# Altium PCB SimpleNYT_prorto.PcbDoc
Units mm, origin at the board's own origin, x right, y up, seen from the top; angles counter-clockwise.
Board outline 37.62 x 40 mm, 2 copper layers (Top Layer, Bottom Layer); 40 components, 42 nets, 145 pads, 3 vias.
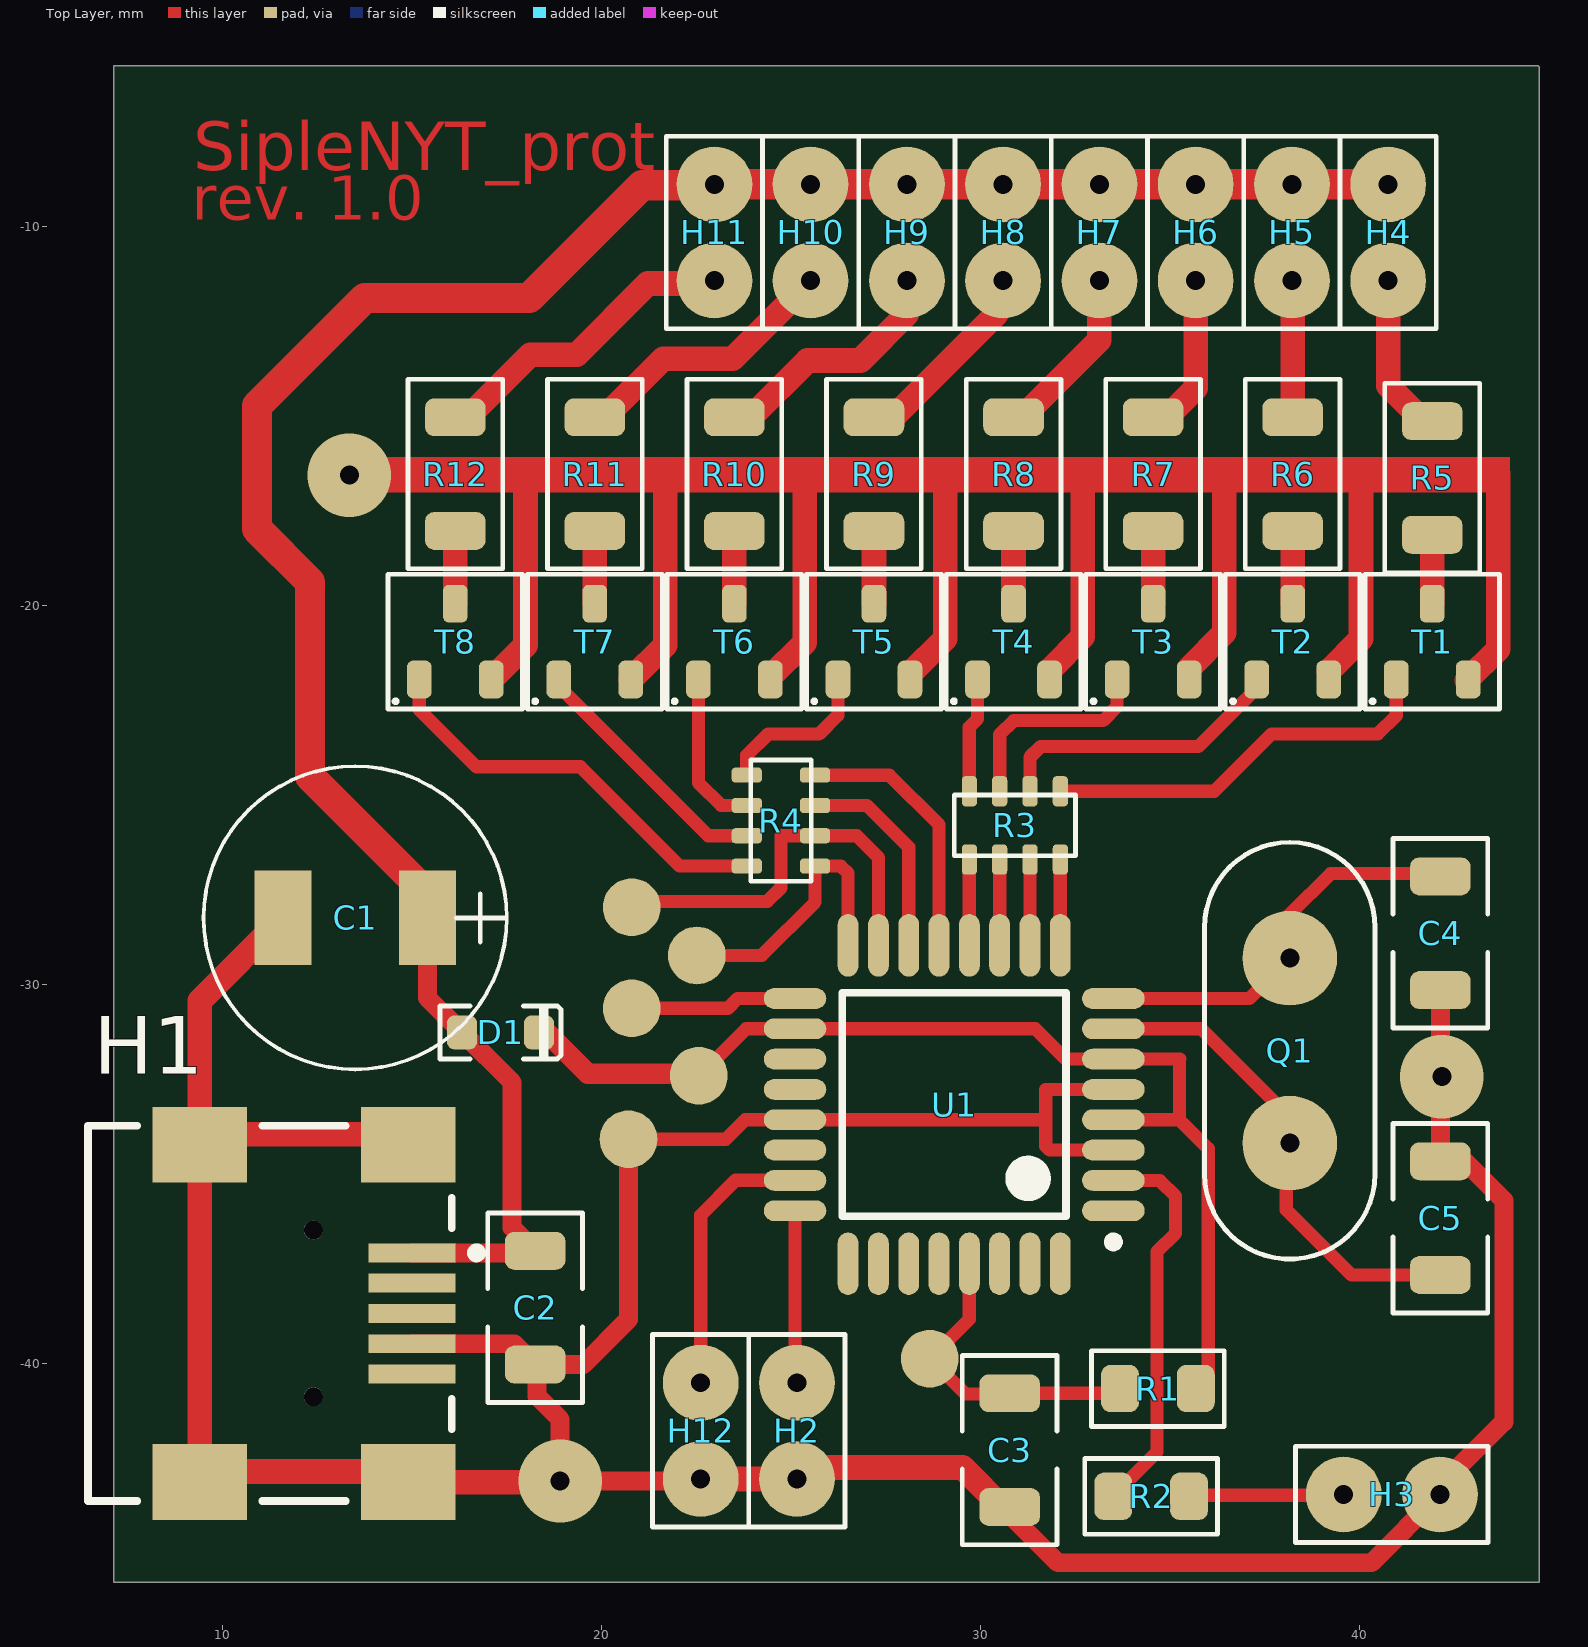
[diagram p0: Top Layer view]
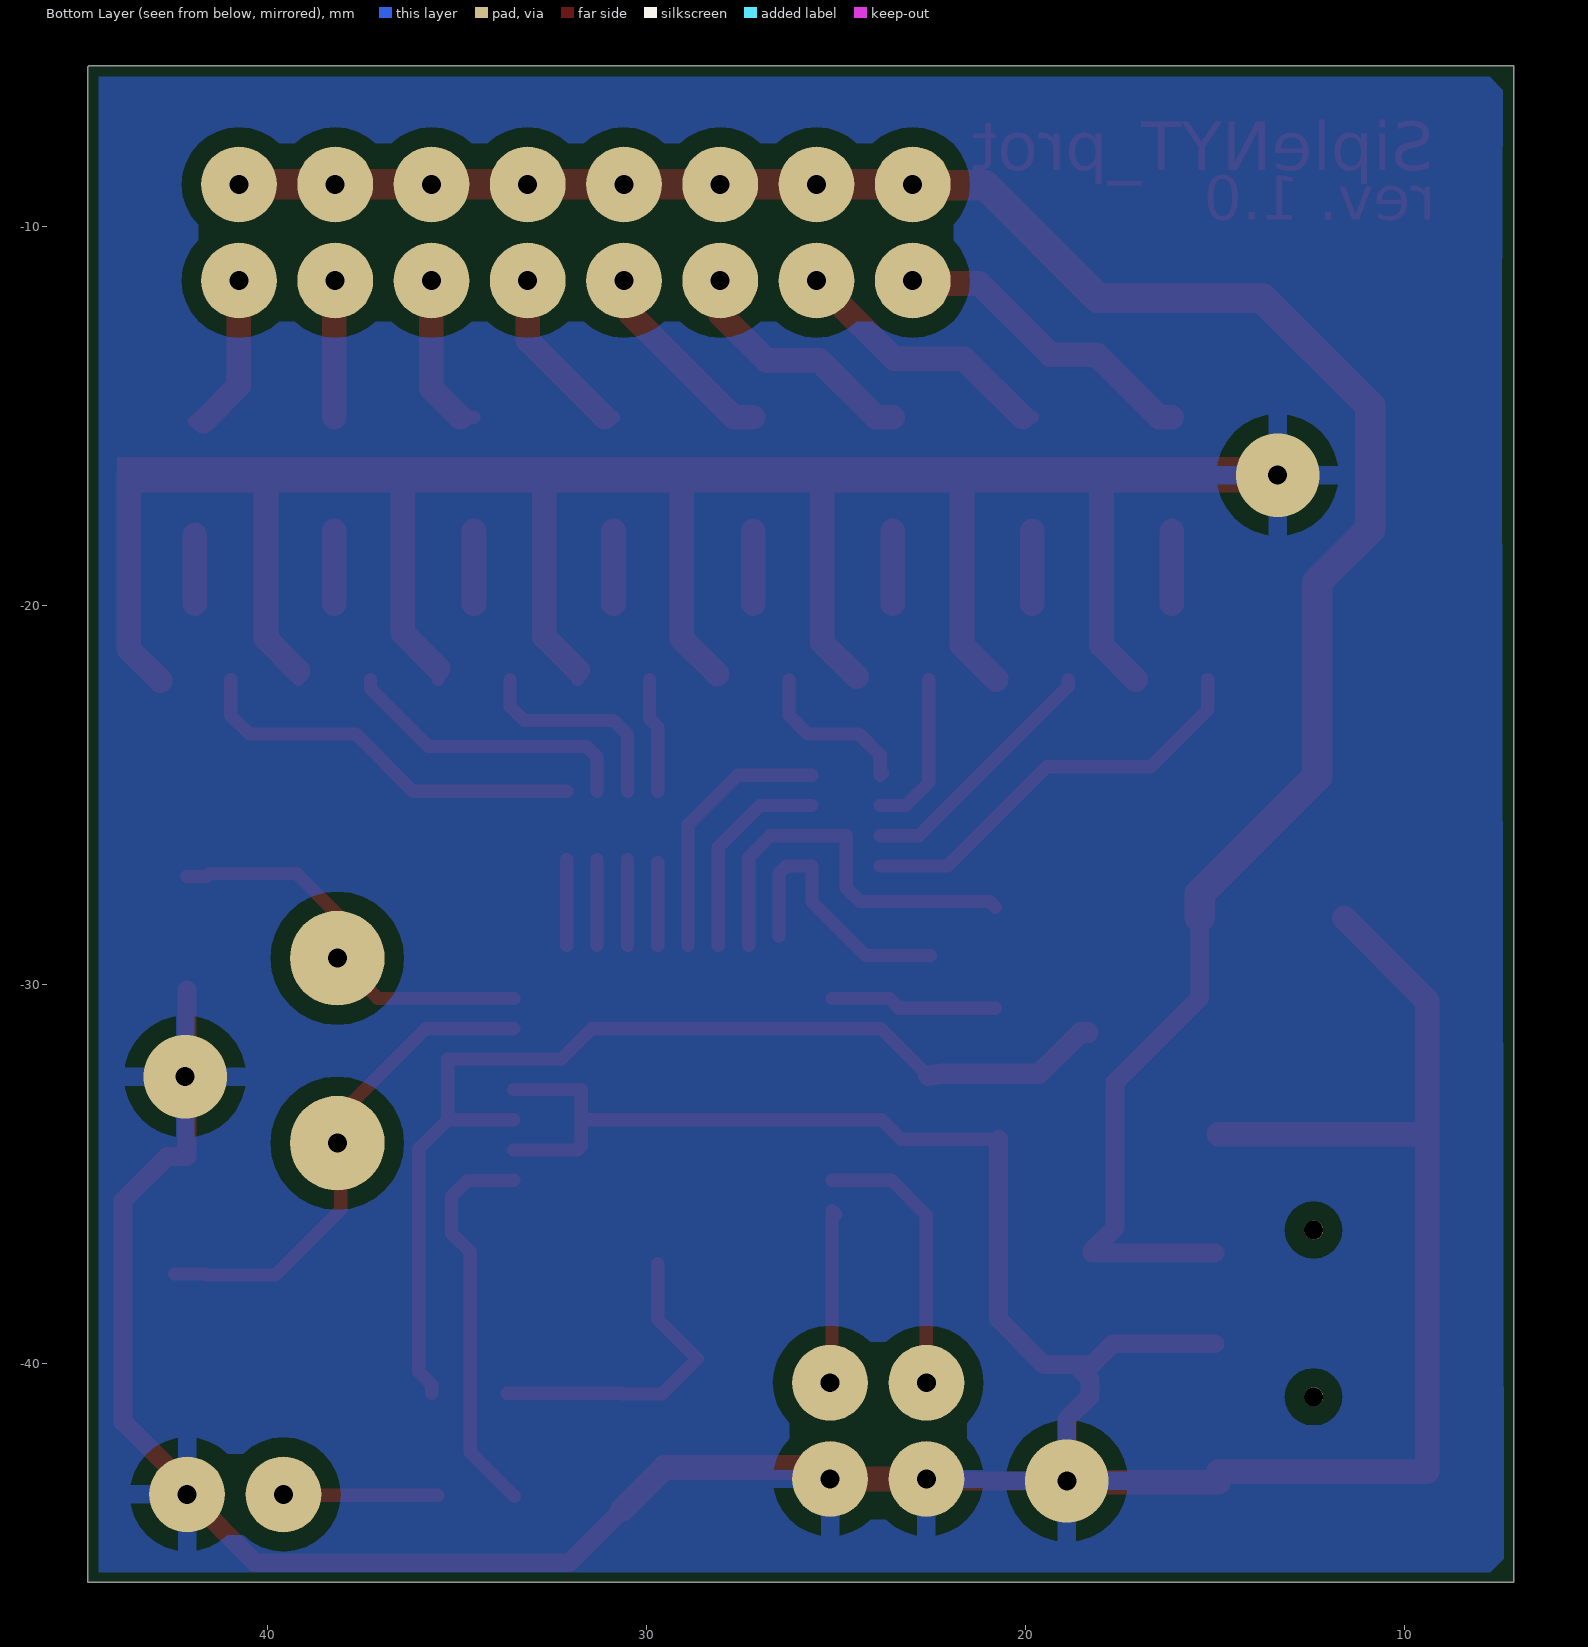
[diagram p1: Bottom Layer view, seen from below]
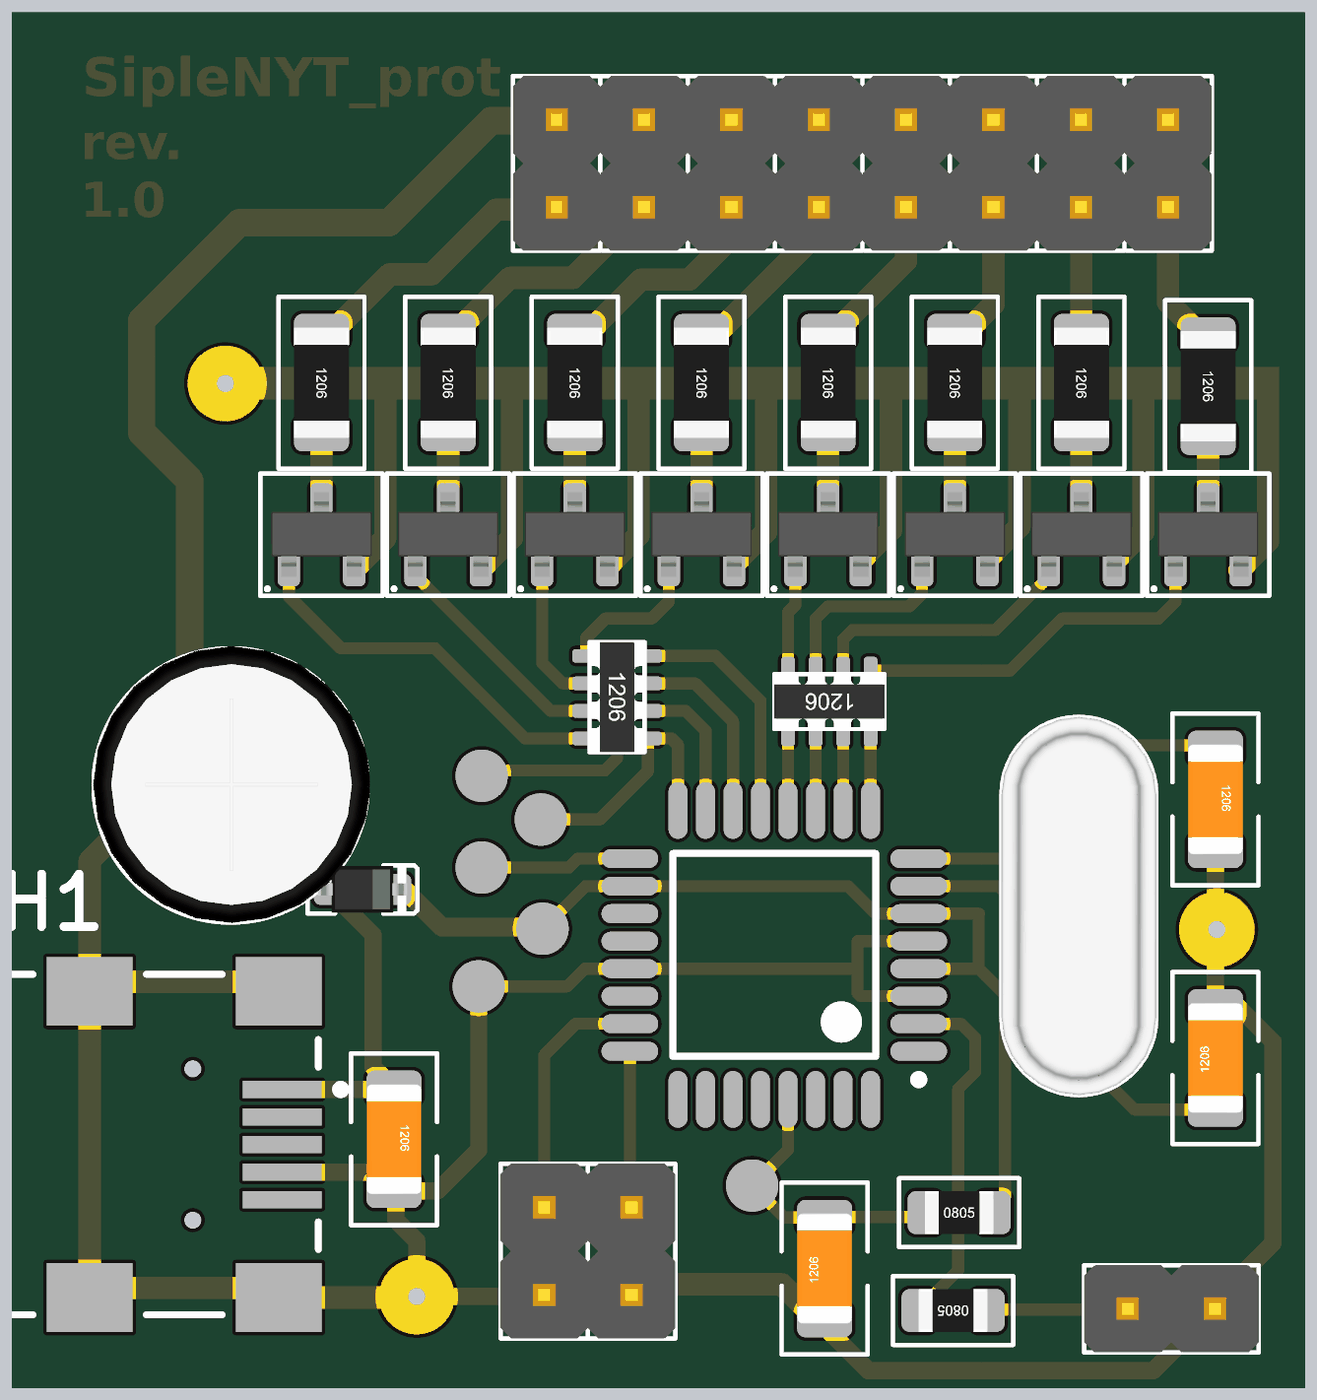
[diagram p2: 3D render of the assembled board from above, using the file's embedded part models]

## Layer stack, top to bottom
Top Solder: solder mask 0.0102, Solder Resist, Dk 3.5
Top Layer: signal copper 0.0356
Dielectric 1: dielectric 0.32, FR-4, Dk 4.8
Bottom Layer: signal copper 0.0356
Bottom Solder: solder mask 0.0102, Solder Resist, Dk 3.5

## Board outline
7.112,-45.771 7.112,-5.766 44.704,-5.766 44.729,-5.791 44.729,-45.771

## Design rules (kind name [scope] priority, off if disabled: settings)
Clearance Clearance_Polygon [InNet('GND') And InPolygon] p1: gap=0.5
Clearance [All] p2: gap=0.25
PlaneConnect [All] p1: planeconnectstyle=Relief reliefexpansion=0.508 reliefentries=4 reliefconductorwidth=0.35 reliefairgap=0.5
PolygonConnect [All] p1: connectstyle=Relief reliefconductorwidth=0.5 reliefentries=4 polygonreliefangle="90 Angle" airgapwidth=0.5
RoomDefinition SimpleNYT_prorto [InComponentClass('SimpleNYT_prorto')] p1: confinementstyle=ConfineIn formatcopy=TRUE lockcomponents=FALSE outline -45,-117.5 5.8,-117.5 5.8,-92.1 -45,-92.1
RoutingVias [All] p1: holewidth=0.711 width=1.27 viastyle="Through Hole" minholewidth=0.711 minwidth=1.27 maxholewidth=0.711 maxwidth=1.27
SolderMaskExpansion [All] p1: expansion=0.102
Width [All] p1: maxlimit=5.254 minlimit=0.254 preferedwidth=0.254
29 further rules are at their usual default settings.

## Components (designator, comment, footprint, x,y, rotation, side; value= is the part's Value field where it differs from the comment)
C1 "470u" El-d8-h12-F3.81 13.487,-28.245 r0 top
C2 "1u" C1206(3216) 18.237,-38.532 r270 top
C3 "100n" C1206(3216) 30.759,-42.291 r90 top
C4 "1u" C1206(3216) 42.122,-28.651 r270 top
C5 "1u" C1206(3216) 42.122,-36.169 r90 top
D1 "1N4148" SOD323 17.323,-31.267 r0 top
H1 "440247-2" 440247 7.137,-38.684 r180 top
H2 "H-1x2" J1x2 25.146,-41.783 r90 top
H3 "H-1x2" J1x2 40.843,-43.459 r0 top
H4 "H-1x2" J1x2 40.747,-10.16 r90 top
H5 "H-1x2" J1x2 38.207,-10.16 r90 top
H6 "H-1x2" J1x2 35.667,-10.16 r90 top
H7 "H-1x2" J1x2 33.127,-10.16 r90 top
H8 "H-1x2" J1x2 30.587,-10.16 r90 top
H9 "H-1x2" J1x2 28.047,-10.16 r90 top
H10 "H-1x2" J1x2 25.507,-10.16 r90 top
H11 "H-1x2" J1x2 22.967,-10.16 r90 top
H12 "H-1x2" J1x2 22.606,-41.783 r90 top
Q1 "16MHz" HC49S 38.151,-31.75 r90 top
R1 "10k" R0805 34.671,-40.665 r0 top
R2 "1k" R0805 34.493,-43.51 r180 top
R3 "4,7k" RM4x0603 30.895,-25.806 r270 top
R4 "4,7k" RM4x0603 24.723,-25.679 r0 top
R5 "47" R1206 41.91,-16.637 r270 top
R6 "47" R1206 38.227,-16.535 r270 top
R7 "47" R1206 34.544,-16.535 r270 top
R8 "47" R1206 30.861,-16.535 r270 top
R9 "47" R1206 27.178,-16.535 r270 top
R10 "47" R1206 23.495,-16.535 r270 top
R11 "47" R1206 19.812,-16.535 r270 top
R12 "47" R1206 16.129,-16.535 r270 top
T1 "BC847C" SOT23 41.91,-20.955 r0 top
T2 "BC847C" SOT23 38.227,-20.955 r0 top
T3 "BC847C" SOT23 34.544,-20.955 r0 top
T4 "BC847C" SOT23 30.861,-20.955 r0 top
T5 "BC847C" SOT23 27.178,-20.955 r0 top
T6 "BC847C" SOT23 23.495,-20.955 r0 top
T7 "BC847C" SOT23 19.812,-20.955 r0 top
T8 "BC847C" SOT23 16.129,-20.955 r0 top
U1 "ATmega88A-AU" 32A_N 29.295,-33.172 r180 top

## Footprints (in the part's own frame and the unit in brackets; to place one, negate y for a bottom-side part, rotate by r counter-clockwise, add the part's x,y. Pads: shape width x height; smd on the part's side, far side on the other; paste and mask are expansions set on the pad)
32A_N [mm] "Thin QFP, 32-Leads, Body 7x7mm, Pitch 0.8mm, IPC Medium Density"
  oval 1.65x0.55 smd: 1(-4.2,2.8) 2(-4.2,2) 3(-4.2,1.2) 4(-4.2,0.4) 5(-4.2,-0.4) 6(-4.2,-1.2) 7(-4.2,-2) 8(-4.2,-2.8) 17(4.2,-2.8) 18(4.2,-2) 19(4.2,-1.2) 20(4.2,-0.4) 21(4.2,0.4) 22(4.2,1.2) 23(4.2,2) 24(4.2,2.8)
  oval 0.55x1.65 smd: 9(-2.8,-4.2) 10(-2,-4.2) 11(-1.2,-4.2) 12(-0.4,-4.2) 13(0.4,-4.2) 14(1.2,-4.2) 15(2,-4.2) 16(2.8,-4.2) 25(2.8,4.2) 26(2,4.2) 27(1.2,4.2) 28(0.4,4.2) 29(-0.4,4.2) 30(-1.2,4.2) 31(-2,4.2) 32(-2.8,4.2)
  silkscreen extent -4.33,-2.95 2.95,3.75, body extent -3.5,-3.5 3.5,3.5, height 1.2
440247 [mm] "Connector; USB2.0, Type B, SM; 5 Position; Right Angle"
  rect 2.3x0.5 smd: 1(-7.85,-1.6) 2(-7.85,-0.8) 3(-7.85,0) 4(-7.85,0.8) 5(-7.85,1.6)
  rect 2.5x2 smd: 6(-7.75,4.45) 7(-2.25,4.45) 8(-7.75,-4.45) 9(-2.25,-4.45)
  round 0.5 hole 0.5 unplated: MH1(-5.25,2.2) MH2(-5.25,-2.2)
  silkscreen extent -9.68,-4.95 0.7,4.95
C1206(3216) [mm]
  rrect50% 1x1.6 smd: 1(-1.5,0) 2(1.5,0)
  silkscreen extent -2.5,-1.25 2.5,1.25, body extent -1.6,-0.8 1.6,0.8, height 1
El-d8-h12-F3.81 [mm]
  rect 1.5x2.5 smd: 1(1.905,0) 2(-1.905,0)
  silkscreen extent -4,-4 4,4, body extent -4,-4 4.05,4.05, height 12.53
HC49S [mm]
  round 2.5 hole 0.5: 1(-2.44,0) 2(2.44,0)
  silkscreen extent -5.5,-2.25 5.5,2.25, body extent -5.5,-2.25 5.5,2.25, height 3.7
J1x2 [mm]
  round 2 hole 0.5: 1(-1.27,0) 2(1.27,0)
  silkscreen extent -2.54,-1.27 2.54,1.27, body extent -2.54,-1.27 2.54,1.27, height 10.1
R0805 [mm]
  rrect50% 1x1.25 smd: 1(-1,0) 2(1,0)
  silkscreen extent -1.75,-1 1.75,1, body extent -1,-0.62 1,0.63, height 0.6
R1206 [mm]
  rrect50% 1x1.6 smd: 1(-1.5,0) 2(1.5,0)
  silkscreen extent -2.5,-1.25 2.5,1.25, body extent -1.6,-0.8 1.6,0.8, height 0.6
RM4x0603 [mm]
  rrect50% 0.8x0.4 smd: 1(-0.9,1.2) 2(-0.9,0.4) 3(-0.9,-0.4) 4(-0.9,-1.2) 5(0.9,-1.2) 6(0.9,-0.4) 7(0.9,0.4) 8(0.9,1.2)
  silkscreen extent -0.8,-1.6 0.8,1.6, body extent -0.8,-1.6 0.8,1.6, height 0.5
SOD323 [mm]
  rrect50% 0.8x0.9 smd: 1(-1.016,0) 2(1.016,0)
  silkscreen extent -1.6,-0.76 1.6,0.7, body extent -1.3,-0.67 1.3,0.67, height 1.1
SOT23 [mm] "SOT-23; 3 Leads; Body 3.0 x 2.6 mm Pitch 0.95mm"
  rrect50% 0.65x1 smd: 1(-0.95,-1) 2(0.95,-1) 3(0,1)
  silkscreen extent -1.78,-1.78 1.78,1.78, body extent -1.46,-1.23 1.46,1.24, height 1

## Part data
C1: library part 470u-16V, "16V"
C2 C3 C4 C5: library part C-1206, "SMD-1206"
D1: "DO-35 75V 0.2A 1uS 4A 4nS"
H1: "USB 2.0, Right Angle, SMT, B Type, Receptacle, 5 Position, Black"
Q1: library part Q
R1 R2: library part R-0805, "SMD 0805 0.1W 5% 150V"
R3 R4: library part 4RM-0603, "SMD 4RM-0603 1\16W 5%"
R5 R6 R7 R8 R9 R10 R11 R12: library part R-1206, "SMD 1206 0.125W 5% 200V"
T1 T2 T3 T4 T5 T6 T7 T8: "SMD-SOT23"
U1: "8-bit AVR Microcontroller, 8KB Flash, 512 Bytes EEPROM, 1KB SRAM, 32-pin TQFP, Industrial Grade (-40°C to 85°C)"

## Free pads (board coordinates)
  round 1.524 smd: 2(20.701,-34.087) 2(20.786,-30.632) 2(20.786,-27.965) 2(22.504,-29.235) 2(22.555,-32.41) 2(28.651,-39.878)

## Via types
v1: diameter 2.2, hole 0.5, Top Layer to Bottom Layer, 2 vias
v2: diameter 2.2/2.2 (per signal layer), hole 0.5, Top Layer to Bottom Layer, 1 vias

## Nets (pads, with @x,y where several pads share a name; then routed paths per layer and width w, separated by ;. In a path a pad name is that pad's centre, name@x,y a point inside that pad or via, vN(x,y) a via of type N, cw(c..) or ccw(c..) an arc to the next point about the centre after c; other vN are vias at no path point)
CH1: R3.8 U1.9 | length 2.3
  Top Layer w0.35: U1.9 R3.8
CH2: R3.7 U1.10 | length 2.3
  Top Layer w0.35: U1.10 R3.7
CH3: R3.6 U1.11 | length 2.3
  Top Layer w0.35: U1.11 R3.6@30.495,-26.706
CH4: R3.5 U1.12 | length 2.2
  Top Layer w0.35: U1.12 R3.5@29.695,-26.782
CH5: R4.8 U1.13 | length 7
  Top Layer w0.35: R4.8 27.587,-24.479 28.895,-25.787 U1.13
CH6: R4.7 U1.14 | length 5.5
  Top Layer w0.35: R4.7 26.99,-25.279 28.095,-26.384 U1.14
FDBCK: R2.2 U1.2 | length 10.4
  Top Layer w0.35: R2.2@33.477,-43.51 34.646,-42.342 34.646,-37.059 35.137,-36.567 35.137,-35.594 34.721,-35.179 33.502,-35.179 U1.2
GND: C1.2 C2.2 C3.1 C4.2 C5.2 H1.4 H1.6 H1.7 H1.8 H1.9 H2.1 H3.2 H12.1 pad.2@20.701,-34.087 T1.2 T2.2 T3.2 T4.2 T5.2 T6.2 T7.2 T8.2 U1.3 U1.5 U1.21 | length 148.3
  Top Layer w0.35: pad.2@20.701,-34.087 23.266,-34.087 23.781,-33.572 U1.21 31.695,-33.572 31.714,-33.553 ; T6.2 T6.2@24.445,-21.885 ; 25.349,-16.485 25.375,-16.459 ; T5.2 T5.2@28.128,-21.808 ; T4.2 T4.2@31.811,-21.707 ; U1.3 31.816,-34.372 31.714,-34.271 31.714,-33.553 ; U1.5 31.714,-32.772 31.714,-33.553 ; T3.2 T3.2@35.494,-21.656 ; T2.2 T2.2@39.177,-21.732 ; T1.2@42.821,-21.98 T1.2@42.821,-21.808
  Top Layer w0.5: H1.4 17.69,-39.484 C2.2 C2.2@18.669,-40.032 ; pad.2@20.701,-34.087 20.701,-38.837 19.506,-40.032 C2.2@18.669,-40.032 ; H12.1 22.555,-43.104 v1(18.898,-43.104) 18.898,-41.478 18.288,-40.869 18.288,-40.413 C2.2@18.669,-40.032 ; C3.1@30.632,-43.866 32.029,-45.263 40.31,-45.263 H3.2 42.113,-43.231 43.8,-41.544 43.8,-35.7 42.644,-34.544 42.122,-34.544 C4.2
  Top Layer w0.65: C1.2 9.387,-30.44 H1.9@9.387,-33.955 ; H1.6 18.867,-43.134 v1(18.898,-43.104) ; H1.6@14.887,-42.855 9.387,-42.855 H1.9@9.387,-33.955 ; H1.8@14.887,-33.955 H1.9@9.387,-33.955 ; T8.2 17.983,-21.051 17.983,-16.535 ; T7.2 21.666,-21.051 21.666,-16.51 ; H12.1 H2.1 25.451,-42.748 29.515,-42.748 C3.1@30.632,-43.866 ; T6.2@24.445,-21.885 25.349,-20.98 25.349,-16.485 ; T5.2@28.128,-21.808 29.058,-20.879 29.058,-16.561 ; T4.2@31.811,-21.707 32.69,-20.828 32.69,-16.51 ; T3.2@35.494,-21.656 36.424,-20.726 36.424,-16.561 ; T2.2@39.177,-21.732 40.03,-20.879 40.03,-16.535 ; T1.2@42.821,-21.98 43.649,-21.152 43.649,-16.51
  other v1: 13.335,-16.561
  other v2: 42.164,-32.436
INT0: H12.2 U1.23 | length 7.3
  Top Layer w0.35: H12.2 22.606,-36.09 23.524,-35.172 U1.23
INT1: H2.2 U1.24 | length 4.7
  Top Layer w0.35: U1.24@24.996,-36.071 U1.24 25.095,-40.462 H2.2
MCVCC: D1.2 pad.2@22.555,-32.41 R1.2 U1.4 U1.6 U1.18 | length 29.2
  Top Layer w0.35: pad.2@22.555,-32.41 22.945,-32.029 23.802,-31.172 U1.18 31.435,-31.172 32.235,-31.972 U1.6 35.245,-31.972 35.239,-31.978 35.239,-33.572 ; U1.4 35.239,-33.572 ; R1.2@35.662,-40.792 35.662,-40.564 36.001,-40.225 36.001,-34.334 35.239,-33.572
  Top Layer w0.55: D1.2 18.542,-31.267 19.634,-32.36 22.22,-32.36 pad.2@22.555,-32.41
MISO/CH8: pad.2@22.504,-29.235 R4.5 U1.16 | length 7.3
  Top Layer w0.35: pad.2@22.504,-29.235 24.215,-29.235 25.623,-27.827 R4.5 26.304,-26.879 26.495,-27.07 U1.16@26.495,-28.727
MOSI/CH7: pad.2@20.786,-27.965 R4.6 U1.15 | length 10.7
  Top Layer w0.35: pad.2@20.786,-27.965 20.938,-27.813 24.367,-27.813 24.723,-27.457 24.723,-26.079 R4.6 26.723,-26.079 27.295,-26.651 U1.15
NetC4_1: C4.1 Q1.2 U1.8 | length 10.7
  Top Layer w0.35: U1.8 37.089,-30.372 Q1.2 38.151,-28.151 39.226,-27.076 41.529,-27.076 41.604,-27.151 C4.1
NetC5_1: C5.1 Q1.1 U1.7 | length 13.1
  Top Layer w0.35: U1.7 35.82,-31.172 38.058,-33.41 38.058,-35.95 39.776,-37.668 41.605,-37.668 41.63,-37.643 C5.1@42.443,-37.643
NetH3_1: H3.1 R2.1 | length 4.1
  Top Layer w0.35: R2.1@35.493,-43.485 39.548,-43.485 H3.1
NetH4_1: H4.1 R5.1 | length 3.8
  Top Layer w0.35: R5.1@41.68,-15.137 R5.1
  Top Layer w0.65: H4.1@40.747,-11.963 40.747,-14.204 R5.1@41.68,-15.137
NetH5_1: H5.1 R6.1 | length 3.1
  Top Layer w0.35: H5.1 H5.1@38.227,-11.45
  Top Layer w0.65: R6.1 H5.1@38.227,-11.983
NetH6_1: H6.1 R7.1 | length 3.7
  Top Layer w0.35: R7.1 R7.1@34.901,-15.035
  Top Layer w0.65: R7.1@34.901,-15.035 35.667,-14.27 H6.1@35.667,-11.963
NetH7_1: H7.1 R8.1 | length 4.7
  Top Layer w0.35: R8.1 R8.1@31.091,-15.035
  Top Layer w0.65: R8.1@31.091,-15.035 33.127,-13 H7.1
NetH8_1: H8.1 R9.1 | length 4.9
  Top Layer w0.35: H8.1@30.587,-11.958 H8.1
  Top Layer w0.65: R9.1 27.687,-15.035 H8.1@30.409,-12.314
NetH9_1: H9.1 R10.1 | length 6.6
  Top Layer w0.35: H9.1@28.047,-12.314 H9.1
  Top Layer w0.65: R10.1 23.928,-15.035 25.425,-13.538 26.822,-13.538 H9.1@28.047,-12.314
NetH10_1: H10.1 R11.1 | length 7.2
  Top Layer w0.35: R11.1 R11.1@20.067,-15.035
  Top Layer w0.65: R11.1@20.067,-15.035 21.615,-13.487 23.449,-13.487 H10.1
NetH11_1: H11.1 R12.1 | length 8.5
  Top Layer w0.65: R12.1 16.461,-15.035 18.11,-13.386 19.329,-13.386 21.209,-11.506 22.51,-11.506 H11.1@22.967,-11.963
NetR3_1: R3.1 T1.1 | length 10.6
  Top Layer w0.35: R3.1 36.156,-24.906 37.669,-23.393 40.474,-23.393 40.96,-22.907 T1.1
NetR3_2: R3.2 T2.1 | length 7.9
  Top Layer w0.35: R3.2 31.295,-24.001 31.572,-23.724 35.738,-23.724 37.277,-22.184 T2.1
NetR3_3: R3.3 T3.1 | length 5.6
  Top Layer w0.35: R3.3 30.495,-23.404 30.861,-23.038 33.223,-23.038 33.594,-22.667 T3.1
NetR3_4: R3.4 T4.1 | length 3
  Top Layer w0.35: R3.4 29.695,-23.213 29.911,-22.997 T4.1
NetR4_1: R4.1 T5.1 | length 4.4
  Top Layer w0.35: R4.1@23.773,-24.429 R4.1 23.823,-23.954 24.384,-23.393 25.73,-23.393 26.228,-22.896 T5.1
NetR4_2: R4.2 T6.1 | length 4.3
  Top Layer w0.35: T6.1 22.545,-24.679 23.145,-25.279 R4.2
NetR4_3: R4.3 T7.1 | length 6.8
  Top Layer w0.35: T7.1 18.862,-22.139 22.802,-26.079 R4.3
NetR4_4: R4.4 T8.1 | length 11.1
  Top Layer w0.35: T8.1 15.179,-22.748 16.688,-24.257 19.431,-24.257 22.053,-26.879 R4.4
NetR5_2: R5.2 T1.3 | length 1.8
  Top Layer w0.65: T1.3 R5.2
NetR6_2: R6.2 T2.3 | length 1.9
  Top Layer w0.65: T2.3 R6.2
NetR7_2: R7.2 T3.3 | length 1.9
  Top Layer w0.65: T3.3 R7.2
NetR8_2: R8.2 T4.3 | length 1.9
  Top Layer w0.65: T4.3 R8.2
NetR9_2: R9.2 T5.3 | length 1.9
  Top Layer w0.65: T5.3 R9.2
NetR10_2: R10.2 T6.3 | length 1.9
  Top Layer w0.65: T6.3 R10.2
NetR11_2: R11.2 T7.3 | length 1.9
  Top Layer w0.65: T7.3 R11.2
NetR12_2: R12.2 T8.3 | length 1.9
  Top Layer w0.65: T8.3 R12.2
RESET: C3.2 pad.2@28.651,-39.878 R1.1 U1.29 | length 8.4
  Top Layer w0.35: U1.29 29.695,-38.834 28.651,-39.878 29.582,-40.808 30.632,-40.808 30.648,-40.792 R1.1@33.671,-40.792
VCC: C1.1 C2.1 D1.1 H1.1 H4.2 H5.2 H6.2 H7.2 H8.2 H9.2 H10.2 H11.2 | length 61.1
  Top Layer w0.5: H1.1 C2.1@18.237,-37.084 ; C1.1 15.392,-30.353 D1.1 17.628,-32.588 17.628,-36.422 C2.1
  Top Layer w0.8: C1.1 15.392,-27.61 12.294,-24.511 12.294,-19.38 10.897,-17.983 10.897,-14.732 13.741,-11.887 18.085,-11.887 21.057,-8.915 22.459,-8.915 H11.2@22.967,-9.423 ; H11.2 H10.2 H9.2 H8.2 H7.2 H6.2 H5.2 H4.2
pads on no net: H1.2 H1.3 H1.5 H1.MH1 H1.MH2 U1.1 U1.17 U1.19 U1.20 U1.22 U1.25 U1.26 U1.27 U1.28 U1.30 U1.31 U1.32
copper on no net: | length 4.4
  Top Layer w0.35: 20.786,-30.632 23.326,-30.632 23.586,-30.372 25.095,-30.372

## Polygon pours and split planes (outlines as drawn)
GND on Bottom Layer "re" (solid, pour order 8): 44.45,-6.045 7.391,-6.045 cw(c-2150.977,-16.523) 7.391,-27 7.366,-45.517 44.45,-45.517

## Other copper
Top Layer:
  rectangle net GND: 13.538,-17.018 43.967,-16.078
  text "SipleNYT_prot" at 9.22,-8.941 h2.2
  text "rev. 1.0" at 9.169,-10.211 h2

## Silkscreen, mask and mechanical layers (free items; w line width, h text height)
Mechanical 1:
  the board outline again, w0.154

## Text inside footprints (layer, text, board x,y; h text height)
H1: Mechanical 1 "PCB Edge" at 6.705,-34.648 h0.25 r270